# EAGLE board LEDgoes Partnerboard USBcomm (EAGLE 6.5.0)
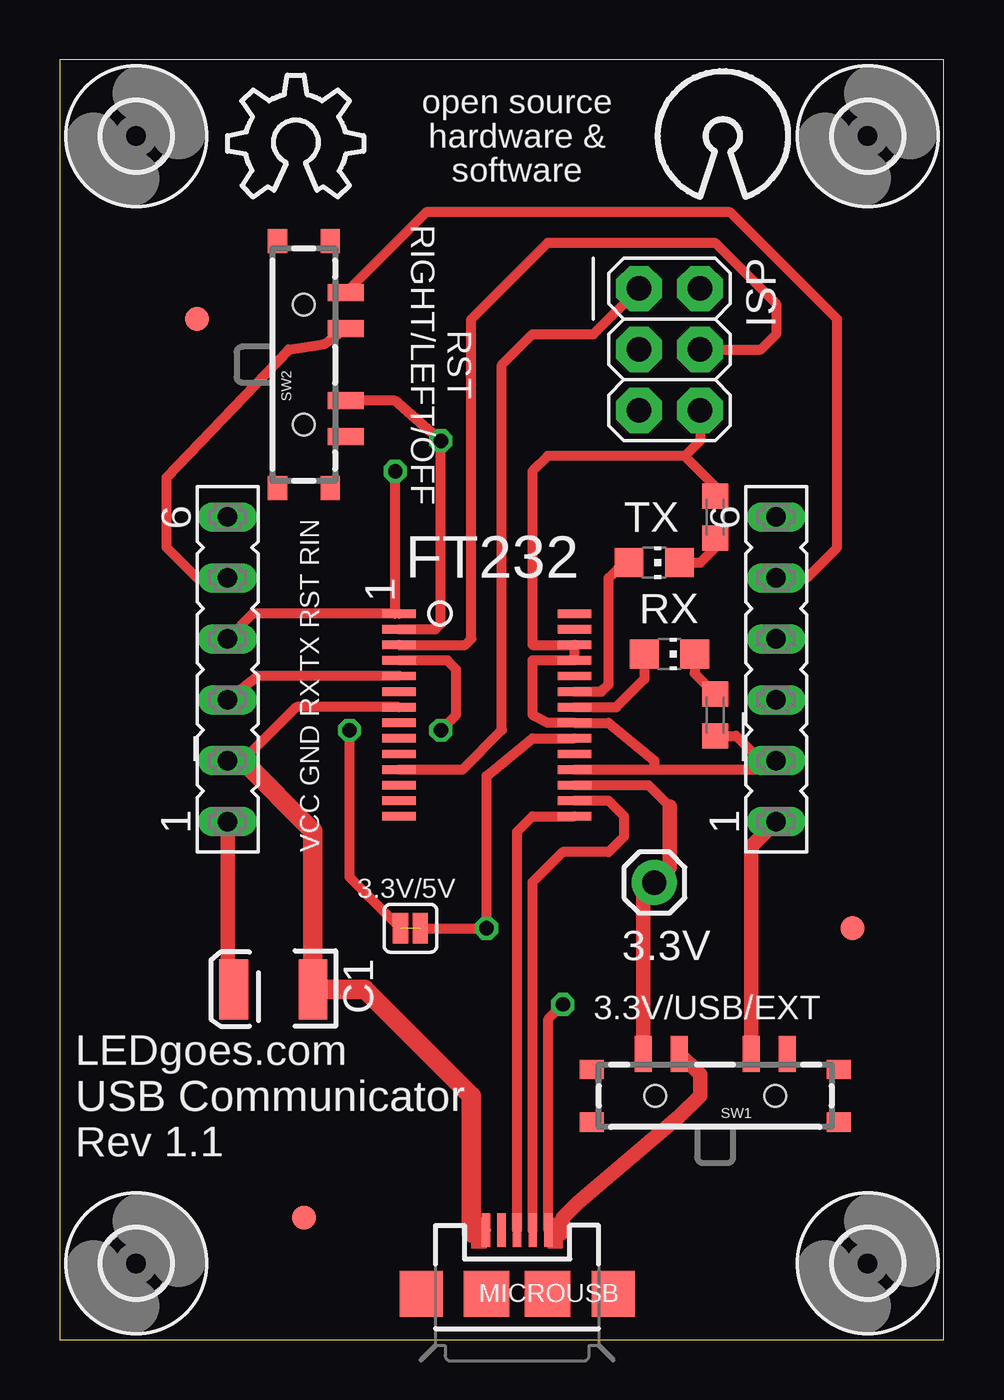
[diagram p0: board, top side]
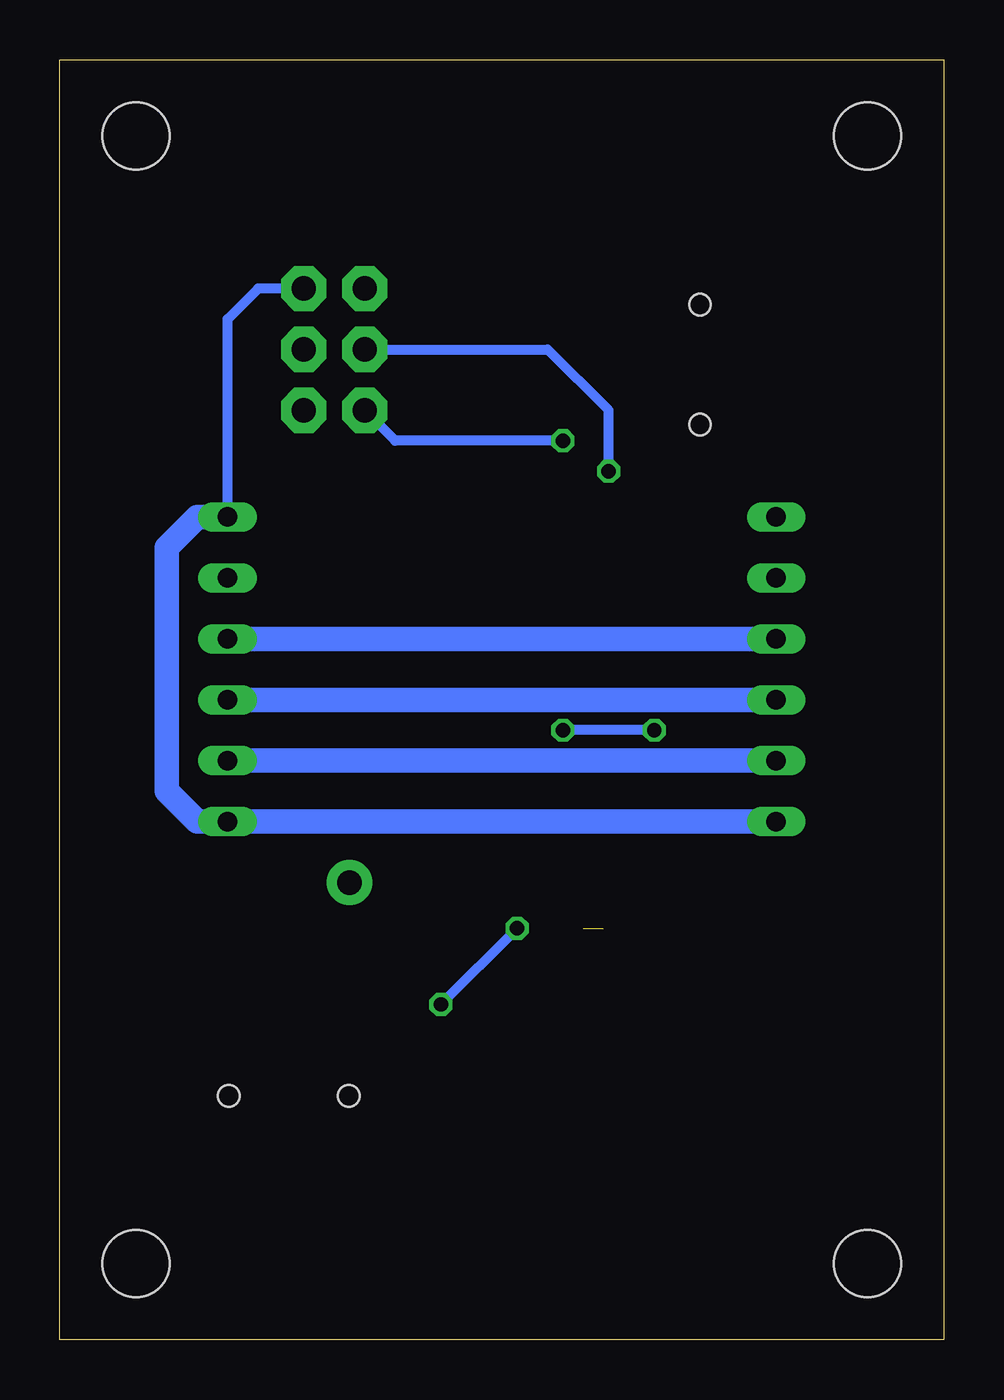
[diagram p1: board, bottom side, seen from below]

Size 36.83 x 53.34 mm. Coordinates in mm from the lower left corner, seen from the top.
Outline: 0,53.34 0,0 36.83,0 36.83,53.34 0,53.34
Copper layers (1*16): Top 0.0356mm / dielectric 1.5011mm / Bottom 0.0356mm
Design rules "LaenPCBOrder *": minimum track width 6mil, minimum drill 13mil, track to track 6mil, track to pad 6mil, pad to pad 6mil, via to via 6mil, smd to smd 6mil, copper to edge 15mil, drill to drill 6mil, minimum pad ring 7mil, minimum via ring 7mil, stop-mask expansion 4mil, vias tented up to drill 0mil, thermal gap 10mil

## Footprints (pad centres in the part's own frame; a part is rotated, then mirrored left to right if it is on the bottom)
1X01 = drill 1.016 pad 1.88: 1 0,0
SJ_2S = smd 0.635 x 1.27: 1 -0.412,0; 2 0.412,0
FE06 = drill 0.813 long: 1 -6.35,0; 2 -3.81,0; 3 -1.27,0; 4 1.27,0; 5 3.81,0; 6 6.35,0
EIA3528 = smd 1.2 x 2.5: A 1.65,0; C -1.65,0
2,8 = hole 2.8: 0,0
FIDUCIAL_1MM = smd 1 x 1: 1 0,0
SSOP28DB = smd 0.348 x 1.397: 1 -4.225,-3.656; 2 -3.575,-3.656; 3 -2.925,-3.656; 4 -2.275,-3.656; 5 -1.625,-3.656; 6 -0.975,-3.656; 7 -0.325,-3.656; 8 0.325,-3.656; 9 0.975,-3.656; 10 1.625,-3.656; 11 2.275,-3.656; 12 2.925,-3.656; 13 3.575,-3.656; 14 4.225,-3.656; 15 4.225,3.656; 16 3.575,3.656; 17 2.925,3.656; 18 2.275,3.656; 19 1.625,3.656; 20 0.975,3.656; 21 0.325,3.656; 22 -0.325,3.656; 23 -0.975,3.656; 24 -1.625,3.656; 25 -2.275,3.656; 26 -2.925,3.656; 27 -3.575,3.656; 28 -4.225,3.656
2X03 = drill 1.016 pad 1.88 octagon: 1 -2.54,-1.27; 2 -2.54,1.27; 3 0,-1.27; 4 0,1.27; 5 2.54,-1.27; 6 2.54,1.27
USB-MICROB = smd 0.35 x 1.4: D+ 0,2.65; D- -0.65,2.65; GND 1.3,2.65; ID 0.65,2.65; VBUS -1.3,2.65 | smd 1.8 x 1.9: MT1 -4,0; MT2 4,0 | smd 1.9 x 1.9: P$1 -1.27,0; P$2 1.27,0
C0603K = smd 1.05 x 1.08: 1 -0.875,0; 2 0.875,0
CHIP-LED0805 = smd 1.2 x 1.2: A 0,-1.05; C 0,1.05
SWITCH-SP3T-SMD = smd 0.7 x 1.5: 1 3,-1.75; 2 1.5,-1.75; 3 -1.5,-1.75; 4 -3,-1.75 | smd 1 x 0.8: P$1 -5.15,-1.1; P$2 -5.15,1.1; P$3 5.15,1.1; P$4 5.15,-1.1 | hole 0.9: 2.5,0; -2.5,0

## Placement (x,y rotation side)
3.3V  [1X01]  24.77,19.05 0 top
3.3V/5V  [SJ_2S]  14.61,17.14 0 top
_  [FE06]  6.99,27.94 90 top
__  [FE06]  29.84,27.94 90 top
C1  [EIA3528]  8.89,14.61 180 top
E$1  [OSHW_8X200_NOTEXT]  6.99,47.62 0 top
E$2  [2,8]  33.66,50.16 0 top
E$3  [2,8]  3.17,50.16 0 top
E$4  [2,8]  3.17,3.17 0 top
E$5  [2,8]  33.66,3.17 0 top
E$6  [FIDUCIAL_1MM]  5.72,42.55 0 top
E$7  [FIDUCIAL_1MM]  10.16,5.08 0 top
E$8  [FIDUCIAL_1MM]  33.02,17.14 0 top
FT232  FT232  [SSOP28DB]  17.78,26.04 270 top
ISP  [2X03]  25.4,41.27 270 top
MICROUSB  [USB-MICROB]  19.05,1.91 0 top
R1  330  [C0603K]  27.3,34.29 90 top
R2  330  [C0603K]  27.3,26.04 90 top
RX  [CHIP-LED0805]  25.4,28.57 270 top
SW1  POWER  [SWITCH-SP3T-SMD]  27.3,10.16 180 top
SW2  RESET  [SWITCH-SP3T-SMD]  10.16,40.64 90 top
TX  [CHIP-LED0805]  24.77,32.38 270 top

## Library data of the parts
3.3V ISP MICROUSB = SparkFun-Connectors
3.3V/5V C1 = SparkFun-Capacitors
_ __ = con-lsta
E$1 = ohw-logo
E$2-E$5 = holes
E$6-E$8 = adafruit
FT232 = ftdichip-3
R1 R2 = resistor
RX TX = led
SW1 SW2 = SparkFun-Electromechanical

## Nets
E$3: 3.3V/5V.1 3.3V/5V.2 FT232.4 FT232.20 MICROUSB.GND SW1.2
S$1: _.2 __.2 C1.C FT232.7 FT232.18 FT232.21 FT232.25 FT232.26 ISP.6 MICROUSB.VBUS R1.2 R2.1
S$2: _.1 __.1 __.6 C1.A ISP.2 SW1.3
S$3: FT232.23 TX.A
S$5: FT232.22 RX.A
S$7: _.3 __.3 FT232.5
S$8: _.4 __.4 FT232.1 ISP.3
S$10: _.5 SW2.2
S$11: __.5 SW2.1
S$12: FT232.2 ISP.5 SW2.3
S$13: 3.3V.1 FT232.17 SW1.1
S$15: FT232.15 MICROUSB.D+
S$16: FT232.16 MICROUSB.ID
S$17: FT232.3 ISP.4
S$18: FT232.11 ISP.1
S$19: R2.2 RX.C
S$20: R1.1 TX.C

## Tracks (layer width: path | path; a pad name or v marks a point on that pad's centre or on a via)
E$3  (via drill 0.6)  (1 unrouted)
  Top 0.406: v20.96,13.97 20.35,13.36 MICROUSB.GND 20.46,4.45 20.96,4.45 | FT232.20 19.69,25.06 17.78,23.5 v17.78,17.14 3.3V/5V.2 | 3.3V/5V.1 12.07,19.27 v12.07,25.4 | v15.88,25.4 16.51,26.04 16.51,27.94 16.14,28.31 FT232.4
  Top 0.61: SW1.2 26.67,11.05 26.67,10.16 25.8,9.3 21.59,5.72 20.96,5.08 20.96,4.45
  Bottom 0.406: v20.96,13.97 v17.78,17.14 | v12.07,25.4 v15.88,25.4
S$1
  Top 0.406: FT232.18 24.77,23.76 | 24.77,23.76 29.48,23.76 __.2 29.21,24.13 28.18,25.16 R2.1 | 24.77,23.76 24.77,24.13 22.86,25.71 FT232.21 20.32,25.71 19.69,26.04 19.69,28.31 FT232.25 FT232.26 19.69,28.96 19.69,36.2 20.32,36.83 26.04,36.83 | 17.14,4.45 17.64,4.45 MICROUSB.VBUS | ISP.6 26.67,37.47 26.04,36.83 | FT232.7 9.85,26.36 7.62,24.13 | R1.2 27.3,35.56 26.04,36.83
  Top 0.813: _.2 7.62,24.13 10.54,21.21 C1.C 12.7,14.61 17.14,10.16 17.14,4.45
  Bottom 1.016: __.2 _.2
S$2
  Top 0.61: C1.A 6.99,15.88 _.1 | __.1 28.8,20.55 SW1.3
  Bottom 0.406: __.6 29.84,42.55 28.57,43.81 ISP.2
  Bottom 1.016: _.1 __.1 31.12,21.59 32.38,22.86 32.38,33.02 31.12,34.29 __.6
S$3
  Top 0.406: FT232.23 22.57,27.01 22.86,27.3 22.86,31.75 23.5,32.38 TX.A
S$5
  Top 0.406: FT232.22 23.19,26.36 24.35,27.53 RX.A
S$7
  Top 0.406: FT232.5 8.25,27.66 _.3
  Bottom 1.016: __.3 _.3
S$8  (via drill 0.6)
  Top 0.406: _.4 8.04,30.26 FT232.1 13.97,30.26 v13.97,36.2
  Bottom 0.406: v13.97,36.2 13.97,38.73 16.51,41.27 ISP.3
  Bottom 1.016: _.4 __.4
S$10
  Top 0.406: _.5 5.72,31.75 4.45,33.02 4.45,35.95 9.52,41.27 11.02,41.51 SW2.2
S$11
  Top 0.406: __.5 31.12,31.75 32.38,33.02 32.38,42.55 27.94,46.99 15.26,46.99 SW2.1
S$12  (via drill 0.6)
  Top 0.406: FT232.2 15.64,29.61 15.88,29.84 v15.88,37.47 13.97,39.14 SW2.3
  Bottom 0.406: v15.88,37.47 22.86,37.47 ISP.5
S$13
  Top 0.406: FT232.17 24.52,23.11 25.4,22.23
  Top 0.61: 25.4,22.23 25.4,19.69 3.3V.1 24.3,19.05 SW1.1
S$15
  Top 0.406: MICROUSB.D+ 19.05,21.18 19.69,21.81 FT232.15
S$16
  Top 0.406: MICROUSB.ID 19.7,19.07 20.96,20.32 22.86,20.32 23.5,20.96 23.5,21.82 22.86,22.46 FT232.16
S$17
  Top 0.406: FT232.3 16.89,28.96 17.14,29.21 17.14,42.55 20.32,45.72 27.3,45.72 29.84,43.18 29.84,41.91 29.21,41.27 ISP.4
S$18
  Top 0.406: ISP.1 22.23,41.91 19.69,41.91 18.41,40.64 18.41,25.4 16.76,23.75 16.75,23.76 FT232.11
S$19
  Top 0.406: RX.C 26.45,27.77 R2.2
S$20
  Top 0.406: R1.1 27.3,33.02 26.67,32.38 TX.C
(copper drawn outside any net)
  shapes: Top area x2

## Text on the board
tNames: open source / hardware & / software | RST / RIGHT/LEFT/OFF | VCC GND RX TX RST RIN | 3.3V/USB/EXT | LEDgoes.com | USB Communicator | Rev 1.1